# Altium PCB LTC4359_28V_5A_pcb.pcbdoc
Units mil, origin at the board's own origin, x right, y up, seen from the top; angles counter-clockwise.
Board outline not stored, 2 copper layers (Top Layer, Bottom Layer); 9 components, 0 nets, 29 pads, 4 vias.
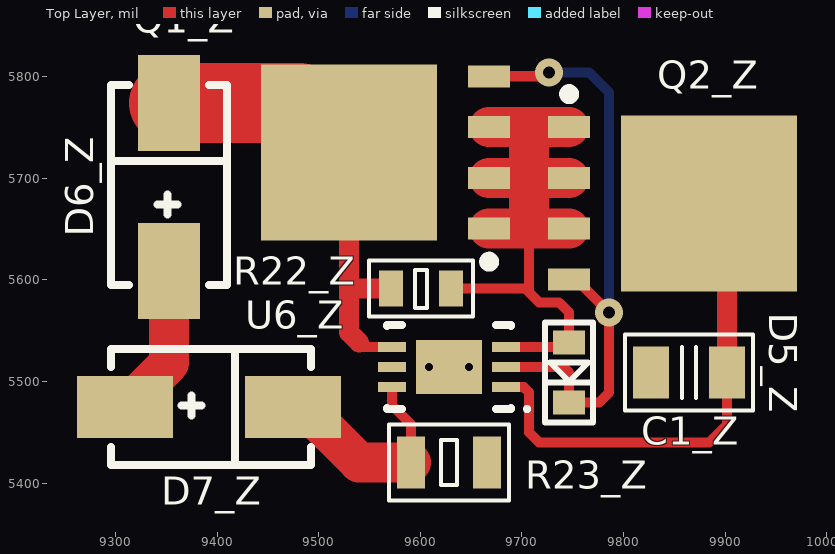
[diagram p0: Top Layer view]
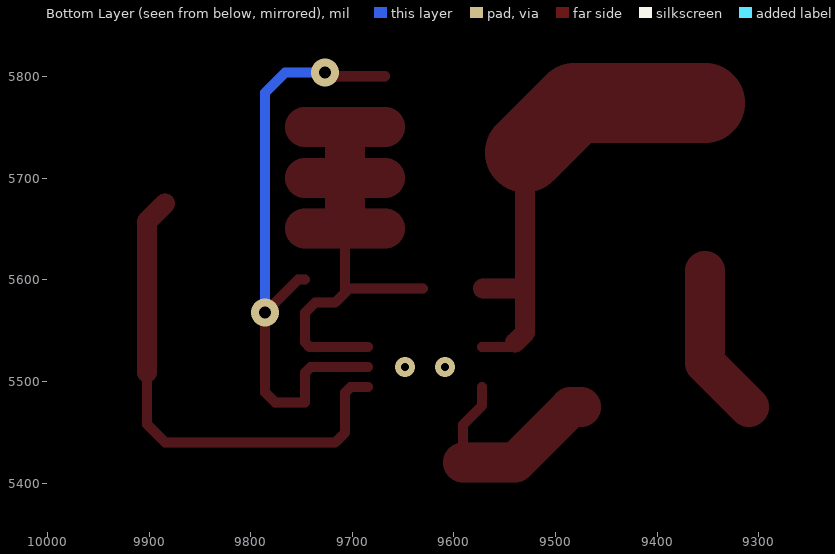
[diagram p1: Bottom Layer view, seen from below]

## Layer stack, top to bottom
Top Solder: solder mask 0.4, Solder Resist, Dk 3.5
Top Layer: signal copper 1.4
Dielectric 1: dielectric 12.6, FR-4, Dk 4.8
Bottom Layer: signal copper 1.4
Bottom Solder: solder mask 0.4, Solder Resist, Dk 3.5

## Components (designator, comment, footprint, x,y, rotation, side; value= is the part's Value field where it differs from the comment)
C1_Z "1.5uF 50V" C_0805 9864.58,5508.94 r0 top (schematic designator C1)
D5_Z "DDZ9699T" "SOD523F - 2" 9746.47,5508.94 r90 top (schematic designator D5)
D6_Z "SMAJ58A" DO-214AC 9352.77,5691.42 r270 top (schematic designator D6)
D7_Z "SMAJ24A" DO-214AC 9392.14,5474.88 r180 top (schematic designator D7)
Q1_Z "PSMN014-80YL" "SOT669_LFPAK56; Power-SO8" 9565.36,5725.47 r180 top (schematic designator Q1)
Q2_Z "PSMN014-80YL" "SOT669_LFPAK56; Power-SO8" 9848.83,5675.47 r0 top (schematic designator Q2)
R22_Z "100K" R_0603 9600.8,5591.61 r0 top (schematic designator R22)
R23_Z "1K" R_0805 9628.36,5420.35 r180 top (schematic designator R23)
U6_Z "LTC4359IDCB#TRMPBF" LT-DCB-6_V 9628.36,5514.25 r180 top (schematic designator U6)

## Footprints (in the part's own frame and the unit in brackets; to place one, negate y for a bottom-side part, rotate by r counter-clockwise, add the part's x,y. Pads: shape width x height; smd on the part's side, far side on the other; paste and mask are expansions set on the pad)
C_0805 [mm] "Capacitor Pattern"
  rect 0.9x1.3 smd: 1(-0.95,0) 2(0.95,0)
  silkscreen extent -1.6,-0.95 1.6,0.95, body extent -1,-0.63 1,0.62, height 0.6
DO-214AC [mm]
  rect 2.4x1.55 smd: 1(2.1,0) 2(-2.1,0)
  silkscreen extent -2.55,-1.45 2.45,1.45, body extent -2.6,-1.3 2.6,1.3, height 2.39
LT-DCB-6_V [mm] "SON, 6-Leads, Body 3x2mm, Pitch 0.5mm, Thermal Pad 1.65x1.35mm"
  rect 0.7x0.25 smd mask+0.102: 1(-1.425,0.5) 2(-1.425,0) 3(-1.425,-0.5) 4(1.425,-0.5) 5(1.425,0) 6(1.425,0.5)
  rect 1.65x1.35 smd mask+0.102: 7(0,0)
  silkscreen extent -2,-1.05 1.55,1.1, body extent -1.57,-1.06 1.55,1.04, height 0.8
R_0603 [mm]
  rect 0.6x0.9 smd: 1(-0.75,0) 2(0.75,0)
  silkscreen extent -1.3,-0.7 1.3,0.7, body extent -0.8,-0.41 0.8,0.41, height 0.45
R_0805 [mm] "Resistor Pattern"
  rect 0.7x1.3 smd: 1(-0.95,0) 2(0.95,0)
  silkscreen extent -1.5,-0.95 1.5,0.95, body extent -1,-0.6 1,0.6, height 0.5
"SOD523F - 2" [mm]
  rect 0.6x0.8 smd: 1(0.75,0) 2(-0.75,0)
  silkscreen extent -1.25,-0.6 1.25,0.6, body extent -0.8,-0.4 0.8,0.4, height 0.7
"SOT669_LFPAK56; Power-SO8" [mm] "DPAK, 4-Leads, Body 5x4.1mm, Pitch 1.27mm, IPC Low Density"
  rect 1.05x0.55 smd: 1(-2.6,1.905) 2(-2.6,0.635) 3(-2.6,-0.635) 4(-2.6,-1.905)
  rect 4.4x4.4 smd: 5(0.9,0)
  silkscreen extent -2.73,2.61 -2.48,2.85, body extent -3.18,-2.45 3.25,2.45, height 1.2

## Part data
C1_Z: library part C0805, "Capacitor"
D5_Z: library part D_SOD523, "Diode"
D6_Z D7_Z: library part D_DO-214AC, "Diode"
Q1_Z Q2_Z: library part "N-ch SOT669/LFPAK56", "Power MOSFET"
R22_Z: library part R0603, "Resistor"
R23_Z: library part R0805, "Resistor"
U6_Z: "ideal diode ic"

## Via types
v1: diameter 27.56, hole 11.81, Top Layer to Bottom Layer, tented both sides, 2 vias
v2: diameter 19.68, hole 7.87, Top Layer to Bottom Layer, 2 vias

## Nets (pads, with @x,y where several pads share a name; then routed paths per layer and width w, separated by ;. In a path a pad name is that pad's centre, name@x,y a point inside that pad or via, vN(x,y) a via of type N, cw(c..) or ccw(c..) an arc to the next point about the centre after c; other vN are vias at no path point)
pads on no net: C1_Z.1 C1_Z.2 D5_Z.1 D5_Z.2 D6_Z.1 D6_Z.2 D7_Z.1 D7_Z.2 Q1_Z.1 Q1_Z.2 Q1_Z.3 Q1_Z.4 Q1_Z.5 Q2_Z.1 Q2_Z.2 Q2_Z.3 Q2_Z.4 Q2_Z.5 R22_Z.1 R22_Z.2 R23_Z.1 R23_Z.2 U6_Z.1 U6_Z.2 U6_Z.3 U6_Z.4 U6_Z.5 U6_Z.6 U6_Z.7
copper on no net: | length 2563.6
  Top Layer w10: 9539.77,5538.46 9544.3,5533.94 9572.25,5533.94 ; 9572.25,5494.57 9572.25,5476.46 9590.95,5457.76 9590.95,5420.35 ; 9630.32,5591.61 9703.16,5591.61 9707.1,5587.68 ; 9667.73,5800.47 9723.04,5800.47 v1(9726.78,5804.21) ; 9684.46,5494.57 9701.78,5494.57 9707.1,5489.25 9707.1,5449.88 9716.94,5440.04 9884.26,5440.04 9901.98,5457.76 9901.98,5508.94 ; 9684.46,5514.25 9741.15,5514.25 9746.47,5508.94 9746.47,5479.41 9775.99,5479.41 9785.84,5489.25 v1(9785.84,5567.99) 9753.36,5600.47 9746.47,5600.47 ; 9684.46,5533.94 9741.94,5533.94 9746.47,5538.46 9746.47,5567.99 9736.62,5577.83 9716.94,5577.83 9707.1,5587.68 ; 9707.1,5650.47 9707.1,5587.68
  Top Layer w19.68: 9529.93,5725.47 9529.93,5591.61 ; 9539.77,5538.46 9529.93,5548.31 9529.93,5591.61 ; 9571.27,5591.61 9529.93,5591.61 ; 9884.26,5675.47 9901.98,5657.76 9901.98,5508.94
  Top Layer w39.37: 9309.46,5474.88 9352.77,5518.19 9352.77,5608.74 ; 9474.81,5474.88 9485.25,5474.88 9539.77,5420.35 9590.95,5420.35 ; 9667.73,5650.47 9746.47,5650.47 ; 9667.73,5700.47 9707.1,5700.47 ; 9667.73,5750.47 9707.1,5750.47 ; 9707.1,5650.47 9707.1,5700.47 ; 9746.47,5700.47 9707.1,5700.47 ; 9746.47,5750.47 9707.1,5750.47 ; 9707.1,5700.47 9707.1,5750.47
  Top Layer w78.74: 9352.77,5774.09 9481.31,5774.09 9529.93,5725.47
  Bottom Layer w10: v1(9726.78,5804.21) 9766.15,5804.21 9785.84,5784.53 v1(9785.84,5567.99)
  other v2: 9608.67,5514.25 9648.04,5514.25